# Altium PCB PCB_Mbed_diffo_tcheunang_tayou.PcbDoc
Units mil, origin at the board's own origin, x right, y up, seen from the top; angles counter-clockwise.
Board outline 1968.5 x 2755.91 mil, 2 copper layers (Top Layer, Bottom Layer); 19 components, 22 nets, 90 pads, 17 vias.
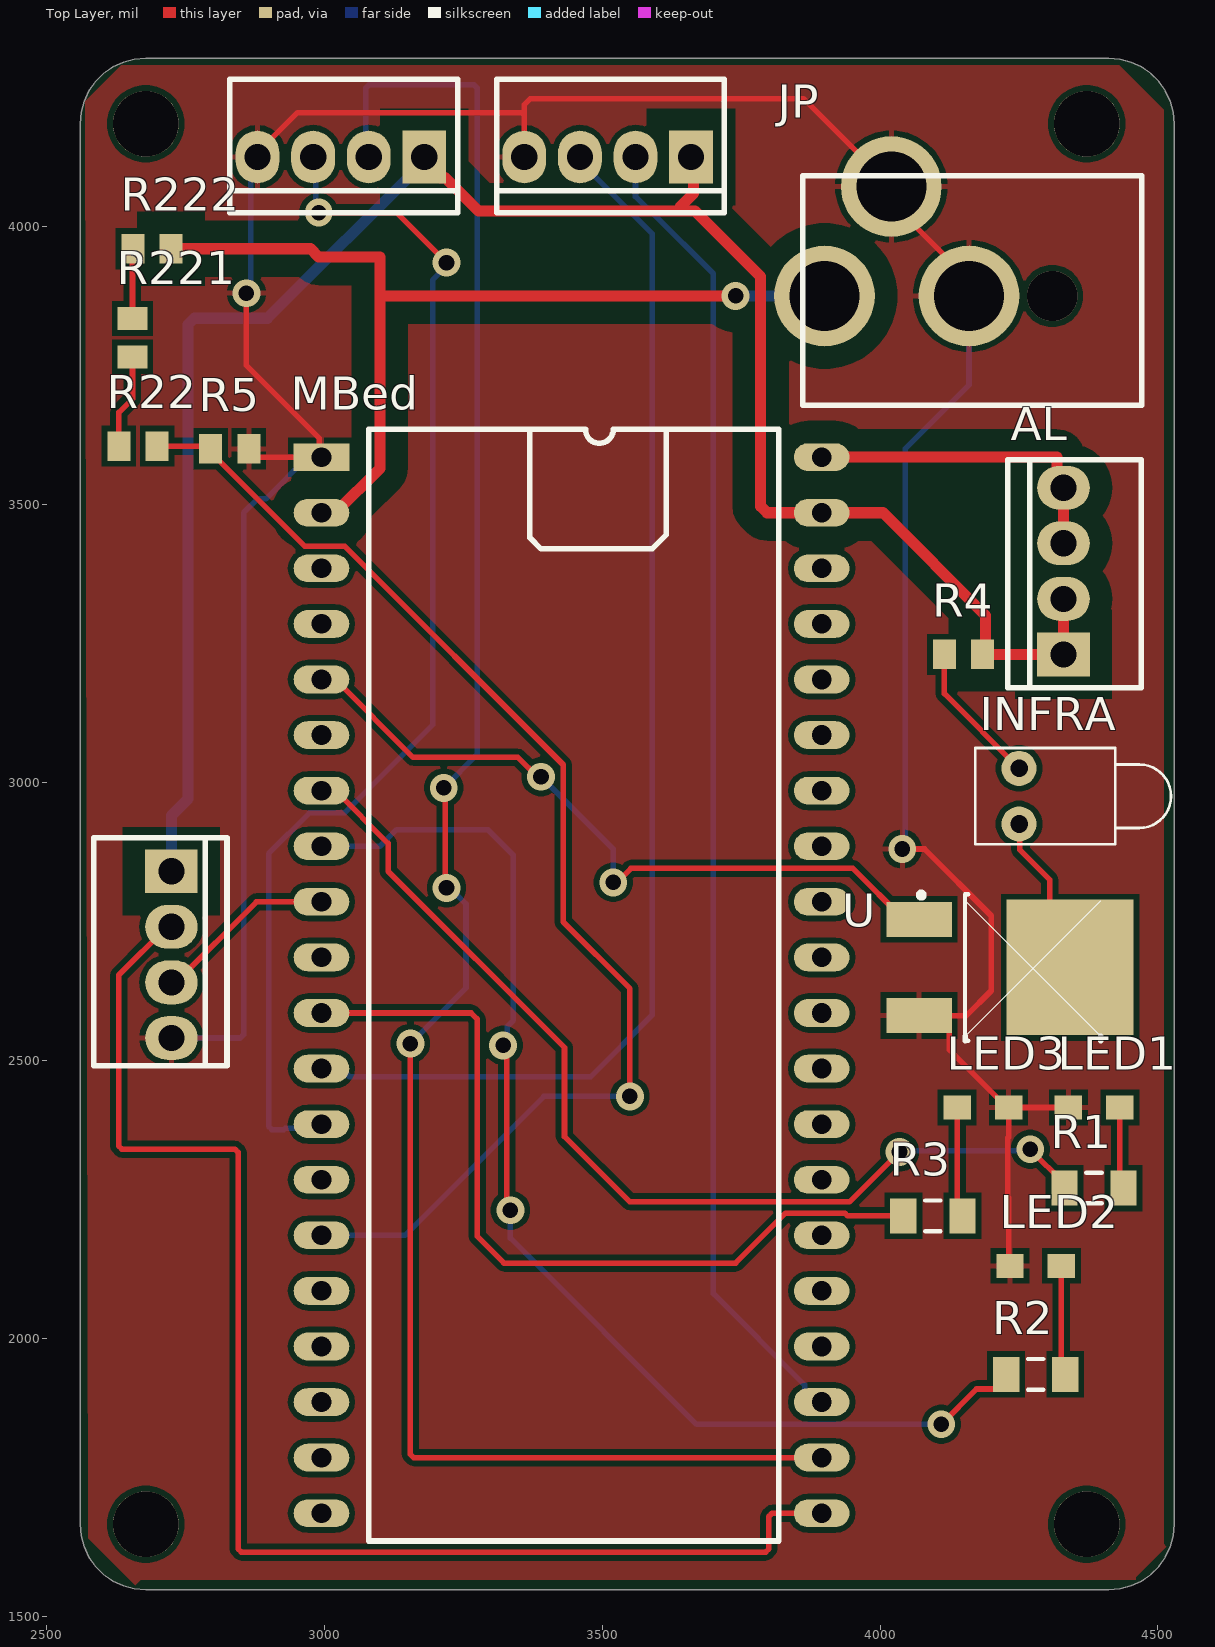
[diagram p0: Top Layer view]
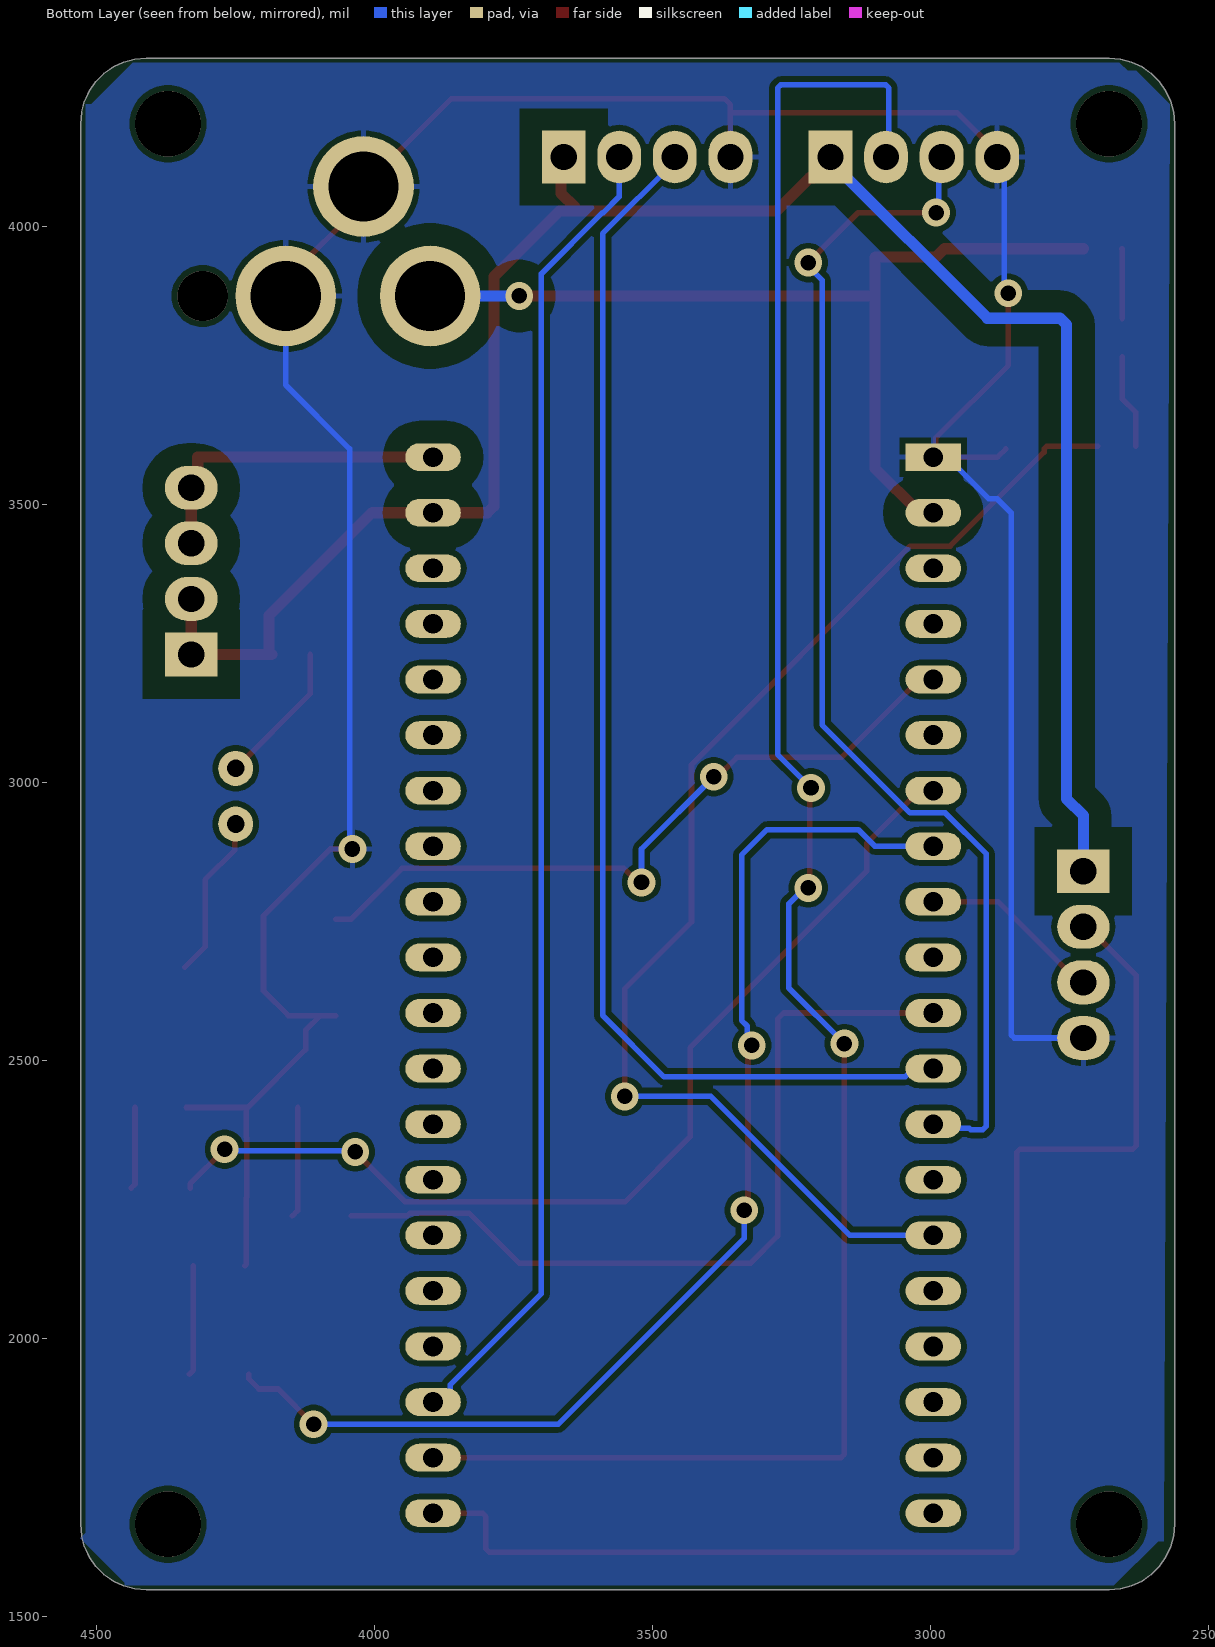
[diagram p1: Bottom Layer view, seen from below]
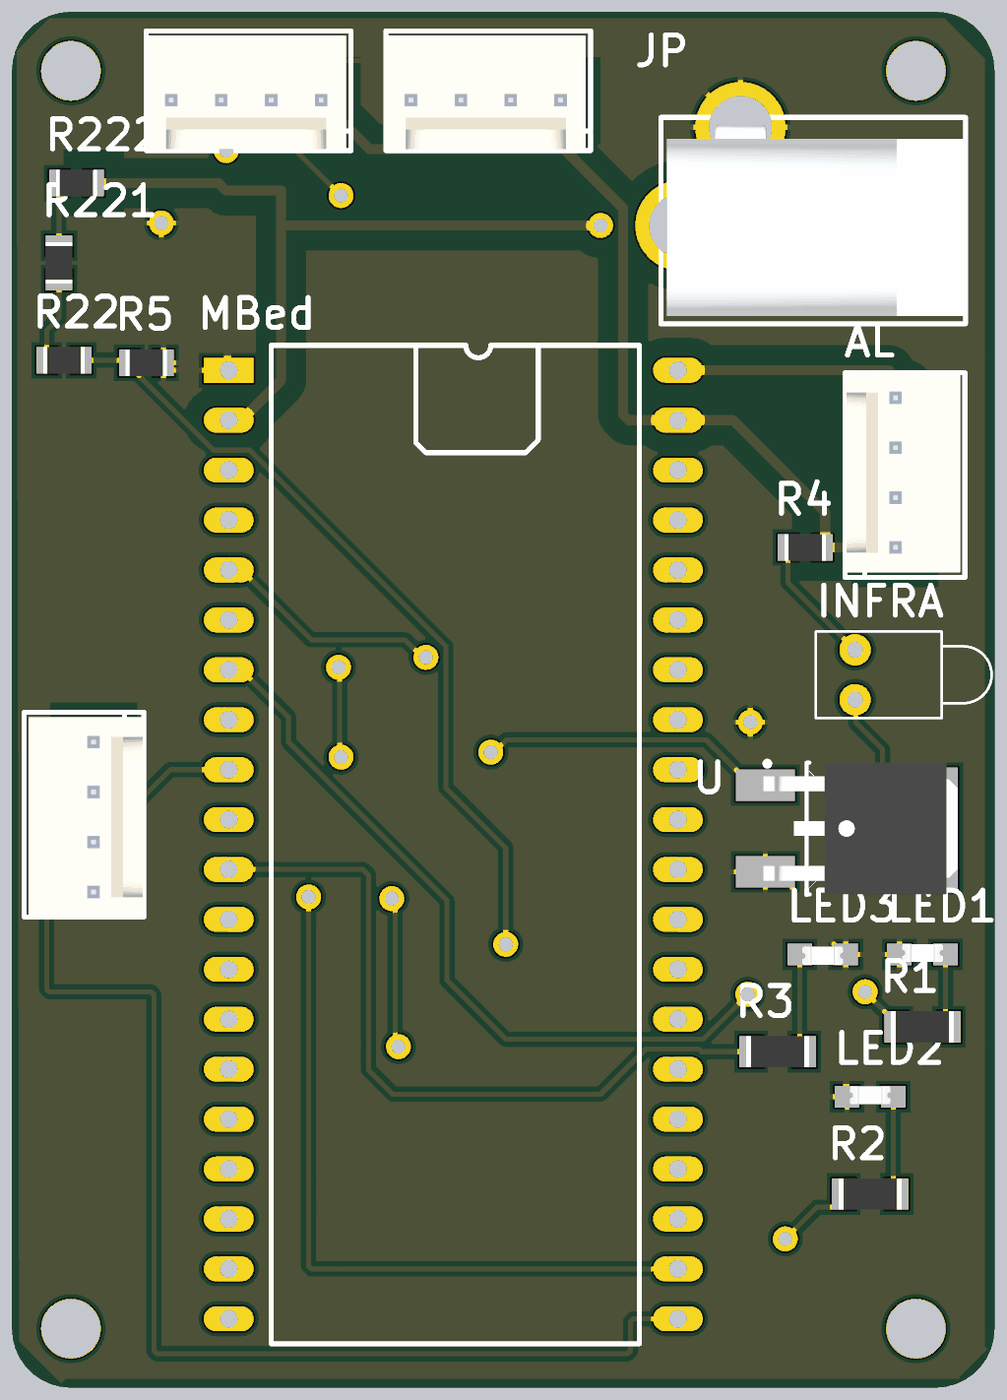
[diagram p2: 3D render of the assembled board from above, using the file's embedded part models]

## Layer stack, top to bottom
Top Solder: solder mask 0.4, Solder Resist, Dk 3.5
Top Layer: signal copper 1.4
Dielectric 1: dielectric 12.6, FR-4, Dk 4.8
Bottom Layer: signal copper 1.4
Bottom Solder: solder mask 0.4, Solder Resist, Dk 3.5

## Board outline
4411.14,1547.05 4431.65,1548.84 4451.54,1554.17 4470.2,1562.87 4487.06,1574.68 4501.62,1589.24 4513.43,1606.1 4522.13,1624.76 4527.46,1644.65 4529.25,1665.16 4529.25,4184.84 4527.46,4205.35 4522.13,4225.24 4513.43,4243.9 4501.62,4260.76 4487.06,4275.32 4470.2,4287.13 4451.54,4295.83 4431.65,4301.16 4411.14,4302.95 2678.86,4302.95 2658.35,4301.16 2638.46,4295.83 2619.8,4287.13 2602.94,4275.32 2588.38,4260.76 2576.57,4243.9 2567.87,4225.24 2562.54,4205.35 2560.75,4184.84 2560.75,1665.16 2562.54,1644.65 2567.87,1624.76 2576.57,1606.1 2588.38,1589.24 2602.94,1574.68 2619.8,1562.87 2638.46,1554.17 2658.35,1548.84 2678.86,1547.05

## Design rules (kind name [scope] priority, off if disabled: settings)
Clearance Clearance_1 [InNetClass('POWER')] p1: gap=10 ignorepadtopadclearanceinfootprint=FALSE except(0: Arc-Hole Track-Hole SMDPad-Hole THPad-Hole Via-Hole Fill-Hole Poly-Hole Region-Hole Text-Hole; 20: Arc-Region Track-Region SMDPad-Region THPad-Region Via-Region Fill-Region Poly-Region Region-Region; 40: Arc-Poly Track-Poly SMDPad-Poly THPad-Poly Via-Poly Fill-Poly Poly-Poly)
Clearance [All] p2: gap=10 ignorepadtopadclearanceinfootprint=FALSE except(0: Arc-Hole Track-Hole SMDPad-Hole THPad-Hole Via-Hole Fill-Hole Poly-Hole Region-Hole Text-Hole)
PolygonConnect [All] p1: connectstyle=Relief reliefconductorwidth=10 reliefentries=4 polygonreliefangle="90 Angle" airgapwidth=10
RoutingVias [All] p1: holewidth=28 width=50 viastyle="Through Hole" minholewidth=28 minwidth=50 maxholewidth=28 maxwidth=50
SolderMaskExpansion [All] p1: expansion=4 istentingtop=FALSE
Width Width_1 [InNetClass('POWER')] p1: maxlimit=20 minlimit=10 preferedwidth=20 bottomlayer_minwidth=20 minimp=50.000000 maximp=50.000000 favimp=50.000000
Width [All] p2: maxlimit=10 minlimit=10 preferedwidth=10
30 further rules are at their usual default settings.

## Classes and differential pairs
net class POWER: VCC_9v VOUT_3_3V VOUT_5V

## Components (designator, comment, footprint, x,y, rotation, side; value= is the part's Value field where it differs from the comment)
AL "ALIM_3_5" MOLEX-KK-22-27-2041 4330,3380 r90 top
INFRA "IR_SFH409" LED-1 4250,2975 r0 top
JP "DC Socket 2.5mm" "DC 2.5mm" 4471.02,3875 r180 top
LED1 "LED_R_0805" "Led - 0805" 4385,2415 r0 top
LED2 "LED_G_0805" "Led - 0805" 4280,2130 r0 top
LED3 "LED_B_0805" "Led - 0805" 4185,2415 r180 top
MBed "mbed LPC1768" DIP40-LARGE 2995,3585 r0 top
R1 "R_100R_1206" RESC3116X06N 4385,2270 r180 top value=100
R2 "R_100R_1206" RESC3116X06N 4280,1935 r180 top value=100
R3 "R_100R_1206" RESC3116X06N 4095,2220 r180 top value=100
R4 "R_330R_0805" RESC2012X05N 4150,3230 r180 top value=330
R5 "R_330R_0805" RESC2012X05N 2830,3600 r180 top value=330
R22 "R_330R_0805" RESC2012X05N 2665,3605 r180 top value=330
R221 "R_120R_0805" RESC2012X05N 2655,3800 r90 top value=120
R222 "R_120R_0805" RESC2012X05N 2690,3960 r0 top value=120
U "T_NMOS_100V_10A_DPAK" DPAK228P990X238-3N 4275,2665 r0 top
? "CAPTEUR 2" MOLEX-KK-22-27-2041 3030,4125 r180 top
? "CAPTEUR 3" MOLEX-KK-22-27-2041 2725,2690 r270 top
? "CAPTEUR 1" MOLEX-KK-22-27-2041 3510,4125 r180 top

## Footprints (in the part's own frame and the unit in brackets; to place one, negate y for a bottom-side part, rotate by r counter-clockwise, add the part's x,y. Pads: shape width x height; smd on the part's side, far side on the other; paste and mask are expansions set on the pad)
"DC 2.5mm" [mm]
  round 4.6 hole 3.2: 1(14.5,0) 2(7.9,0) 2(11.45,-5)
  silkscreen extent 0,-5.5 15.5,5, body extent 0,-5.1 15.2,4.6, height 11.5
DIP40-LARGE [mm]
  rect 2.54x1.27 hole 0.9: 1(0,0)
  oval 2.54x1.27 hole 0.9: 2(0,-2.54) 3(0,-5.08) 4(0,-7.62) 5(0,-10.16) 6(0,-12.7) 7(0,-15.24) 8(0,-17.78) 9(0,-20.32) 10(0,-22.86) 11(0,-25.4) 12(0,-27.94) 13(0,-30.48) 14(0,-33.02) 15(0,-35.56) 16(0,-38.1) 17(0,-40.64) 18(0,-43.18) 19(0,-45.72) 20(0,-48.26) 21(22.86,-48.26) 22(22.86,-45.72) 23(22.86,-43.18) 24(22.86,-40.64) 25(22.86,-38.1) 26(22.86,-35.56) 27(22.86,-33.02) 28(22.86,-30.48) 29(22.86,-27.94) 30(22.86,-25.4) 31(22.86,-22.86) 32(22.86,-20.32) 33(22.86,-17.78) 34(22.86,-15.24) 35(22.86,-12.7) 36(22.86,-10.16) 37(22.86,-7.62) 38(22.86,-5.08) 39(22.86,-2.54) 40(22.86,0)
  silkscreen extent 2.16,-49.53 20.9,1.27, body extent -1.65,-49.5 24.87,1.3, height 10.92
DPAK228P990X238-3N [mm] "D-PAK, 3-Pads, Body 6,20x6,72mm (max), IPC Medium Density"
  rect 3x1.6 smd: 1(-5.203,2.251) 2(-5.203,-2.149)
  rect 5.8x6.2 smd: 3(1.697,0.051)
  silkscreen extent -5.23,-3.3 3.09,3.48, body extent -5.3,-3.3 4.6,3.4, height 2.38
"Led - 0805" [mm] "Led generic, 2-Leads, Body 2,00x1,25mm, IPC Medium Density"
  rect 1.25x1.1 smd: 1(1.175,0) 2(-1.175,0)
  body extent -1.03,-0.38 1.03,0.53, height 0.85
LED-1 [mm] "LED; 2 Leads"
  round 1.6 hole 0.8: 1(0,1.27) 2(0,-1.27)
  silkscreen extent -2,-2.2 6.95,2.2
MOLEX-KK-22-27-2041 [mm] "2.54mm (.100\") Pitch KK® Wire-to-Board Header, Vertical, with Friction Lock, 4 Circuits"
  rect 2x2.4 hole 1.2: 1(-3.81,0)
  oval 2x2.4 hole 1.2: 2(-1.27,0) 3(1.27,0) 4(3.81,0)
  silkscreen extent -5.33,-3.56 5.08,2.54, body extent -5.08,-3.33 5.08,2.47, height 11.54
RESC2012X05N [mm] "Chip Resistor, 2-Leads, Body 2,00x1,25mm, IPC Medium Density"
  rect 1.05x1.35 smd: 1(-0.875,0) 2(0.875,0)
  body extent -1.05,-0.67 1.05,0.67, height 0.5
RESC3116X06N [mm] "Chip Resistor, 2-Leads, Body 3,10x1,55mm, IPC Medium Density"
  rect 1.2x1.6 smd: 1(-1.35,0) 2(1.35,0)
  silkscreen extent -0.35,-0.7 0.35,0.7, body extent -1.6,-0.8 1.6,0.8, height 0.65

## Part data
AL ? ? ?: library part MOLEX_KK_4CTS_VERTICAL, "2.54mm (.100\") Pitch KK® Wire-to-Board Header, Vertical, with Friction Lock, 4 Circuits", Supplier Part Number 1=4838483P, Supplier 1=RSComponents
INFRA: library part LED1, "Typical RED GaAs LED", LatestRevisionDate=08-Jul-2005, LatestRevisionNote="Mech Layer 1 removed.", PackageDescription="LED; 2 Leads", PackageReference=LED-1, Published=8-Jun-2000, Publisher="Altium Limited"
JP: "DC Socket 2.5mm 16V 2A", Supplier Part Number 1=884-0944, Supplier 1=RS-Components
LED1: "Red GaAlAs LED 0805 41mcd 160°", Supplier Part Number 1=1217787, Mounting=YES, Supplier 1=RSComponents
LED2: "Green GaAs LED 0805 6mcd 130°", Supplier Part Number 1=1689723, LatestRevisionDate=17-Jul-2002, LatestRevisionNote="Re-released for DXP Platform.", Mounting=YES, PackageDescription="SM LED; 2 Flat Leads", PackageReference=3.2X1.6X1.1, PackageVersion=Feb-2002, Published=8-Jun-2000, Publisher="Altium Limited", Supplier 1=RSComponents
LED3: "Blue InGaN LED 0805 180mcd 130°", Supplier Part Number 1=1689728, Mounting=YES, Supplier 1=RSComponents
MBed: "Prototyping Board", Supplier Part Number 1=1761179, Supplier 1=Farnell, Supplier 2=RS-Components, Supplier Part Number 2=769-4182
R1 R2 R3: "Resistor 100 Ohms 1/3W 1206 1%", Supplier Part Number 1=2689160, Mounting=YES, Supplier 1=Farnell
R4 R5 R22: "Resistor 330 Ohms 0.5W 0805 1%", Mounting=YES, Supplier 1=RSComponents
R221 R222: "Resistor 120 Ohms 0.5W 0805 5%", Supplier Part Number 1=1621662, Mounting=YES, Supplier 1=RSComponents
U: "IRLR120 MOSFET N-CH 100V 10A DPAK", Supplier Part Number 1=2781153, Mounting=YES, Supplier 1=Farnell

## Free pads (board coordinates)
  round 118.11 hole 118.11: 1(2678.86,1665.16) 1(2678.86,4184.84) 1(4371.77,1665.16) 1(4371.77,4184.84)

## Via types
v1: diameter 50, hole 28, Top Layer to Bottom Layer, 16 vias
v2: diameter 90.55, hole 90.55, Top Layer to Bottom Layer, 1 vias

## Nets (pads, with @x,y where several pads share a name; then routed paths per layer and width w, separated by ;. In a path a pad name is that pad's centre, name@x,y a point inside that pad or via, vN(x,y) a via of type N, cw(c..) or ccw(c..) an arc to the next point about the centre after c; other vN are vias at no path point)
COM_LED: MBed.15 R5.2 R22.1 | length 2276.4
  Top Layer w10: R22.1 2790.55,3605 R5.2 2795.55,3594.09 2964.65,3425 3036.57,3425 3430,3031.57 3430,2748.7 3550,2628.7 v1(3550,2435)
  Bottom Layer w10: MBed.15 3145,2185 3395,2435 v1(3550,2435)
ECHO_1: ?.3@3460,4125 MBed.12 | length 2245.1
  Bottom Layer w10: MBed.12 3030.82,2485 3045.82,2470 3479.14,2470 3590,2580.86 3590,3987.13 3460,4117.13 ?.3@3460,4125
ECHO_2: ?.3@2980,4125 MBed.13 | length 2201.7
  Top Layer w10: v1(2990,4025) 3130,4025 v1(3220,3935)
  Bottom Layer w10: ?.3@2975,4125 2980,4125 2980,4100.24 2985,4095.24 2985,4030 v1(2990,4025) ; MBed.13 2987.48,2377.48 2930,2377.48 2927.52,2375 2905.86,2375 2900,2380.86 2900,2871.57 2973.43,2945 3036.57,2945 3195,3103.43 3195,3903.43 3220,3928.43 v1(3220,3935)
ECHO_3: ?.3@2725,2640 MBed.9 | length 330.1
  Top Layer w10: ?.3@2725,2640 2732.87,2640 2877.87,2785 MBed.9
gate: MBed.5 U.1 | length 1309.7
  Top Layer w10: MBed.5 3020,3185 3160,3045 3348.43,3045 3383.43,3010 v1(3390,3010) ; v1(3520,2820) 3526.57,2820 3551.57,2845 3951.23,2845 4042.61,2753.61 U.1
  Bottom Layer w10: v1(3390,3010) 3520,2880 v1(3520,2820)
GND: ?.4 JP.2 LED1.2 LED2.2 LED3.2 MBed.1 R5.1 U.2 | length 5747.6
  Top Layer w10: v1(2860,3880) 2860,3750 2990.86,3619.14 2990.86,3589.14 MBed.1 2879.45,3585 R5.1 ; ?.4@2880,4125 2880,4132.87 2952.13,4205 3355,4205 3360,4200 ; ?.4@3360,4125 3360,4200 ; v1(4040,2880) 4080,2880 4200,2760 4200,2625 4155.39,2580.39 U.2@4097.73,2580.39 ; U.2 U.2@4097.73,2580.39 ; JP.2@4160,3875 4160,3903.54 4020.24,4043.31 4020.24,4071.85 3862.09,4230 3370.86,4230 3360,4219.14 3360,4200 ; LED2.2 4231.26,2132.48 4231.26,2252.83 4230,2254.09 4230,2360.26 4231.26,2361.52 LED3.2 ; LED1.2 LED3.2 ; U.2@4097.73,2580.39 4124.23,2553.89 4124.23,2519.08 4228.31,2415 LED3.2
  Bottom Layer w10: ?.4@2725,2540 2849.14,2540 2855,2545.86 2855,3485 2880,3510 2895,3510 2970,3585 MBed.1 ; v1(2860,3880) 2867.65,3887.65 2867.65,4112.65 ?.4@2880,4125 ; v1(4040,2880) 4045,2885 4045,3600 4160,3715 JP.2@4160,3875
LED_bleu: MBed.11 R3.2 | length 1501.5
  Top Layer w10: MBed.11 3264.14,2585 3275,2574.14 3275,2183.43 3323.43,2135 3740,2135 3830,2225 3936.57,2225 3941.57,2220 R3.2
LED_rouge: MBed.7 R1.2 | length 1839.6
  Top Layer w10: MBed.7 3020,2985 3115,2890 3115,2840 3432.2,2522.8 3432.2,2362.58 3549.79,2245 3945,2245 v1(4035,2335) ; v1(4270,2340) 4270,2339.72 4331.85,2277.87 R1.2
  Bottom Layer w10: v1(4035,2335) 4037.5,2337.5 4267.5,2337.5 v1(4270,2340)
LED_verte: MBed.8 R2.2 | length 2151.1
  Top Layer w10: v1(3321.72,2526.72) 3328.36,2520.07 3328.36,2236.64 v1(3335,2230) ; v1(4110,1845) 4173.5,1908.5 4208.23,1908.5 4226.85,1927.13 R2.2
  Bottom Layer w10: MBed.8 3100.02,2885 3130.02,2915 3294.14,2915 3340,2869.14 3340,2571.72 3329.37,2561.09 3329.37,2534.37 v1(3321.72,2526.72) ; v1(3335,2230) 3335,2180 3670,1845 v1(4110,1845)
NetINFRA_1: INFRA.1 R4.2 | length 260.7
  Top Layer w10: R4.2 4115.55,3159.45 INFRA.1
NetINFRA_2: INFRA.2 U.3 | length 296
  Top Layer w10: INFRA.2 4251.5,2923.5 4251.5,2878.5 4305,2825 4305,2703.83 U.3
NetLED1_1: LED1.1 R1.1 | length 147.9
  Top Layer w10: LED1.1 4431.26,2276.89 R1.1
NetLED2_1: LED2.1 R2.1 | length 197.9
  Top Layer w10: LED2.1 4326.26,1941.89 R2.1
NetLED3_1: LED3.1 R3.1 | length 198.9
  Top Layer w10: LED3.1 4138.74,2229.41 R3.1
NetR22_2: R22.2 R221.1 | length 170.7
  Top Layer w10: R22.2 2630.55,3665.55 2655,3690 R221.1
NetR221_2: R221.2 R222.1 | length 125.8
  Top Layer w10: R221.2 2655,3959.45 R222.1
TRIG_1: ?.2@3560,4125 MBed.23 | length 2386.8
  Bottom Layer w10: ?.2@3560,4125 3560,4053.65 3588.65,4025 3590,4025 3700,3915 3700,2080 3864.22,1915.78 3864.22,1903.48 3882.69,1885 MBed.23
TRIG_2: ?.2@3080,4125 MBed.22 | length 3631.6
  Top Layer w10: v1(3155,2530) 3155,1790.86 3160.86,1785 MBed.22 ; v1(3215,2990) 3225.82,2990 3217.5,2981.68 3217.5,2812.5 v1(3220,2810)
  Bottom Layer w10: ?.2@3080,4125 3075,4130 3075,4249.14 3080.86,4255 3269.14,4255 3275,4249.14 3275,3050 v1(3215,2990) ; v1(3155,2530) 3255,2630 3255,2781.36 3226.36,2810 v1(3220,2810)
TRIG_3: ?.2@2725,2740 MBed.21 | length 2486.8
  Top Layer w10: ?.2@2725,2740 2717.13,2740 2630,2652.87 2630,2345.86 2635.86,2340 2839.14,2340 2845,2334.14 2845,1620.86 2850.86,1615 3794.14,1615 3800,1620.86 3800,1679.14 3805.86,1685 MBed.21
VCC_9v: JP.1 MBed.2 R222.2 | length 1700.1
  Top Layer w20: R222.2 2975,3960 2990,3945 3100,3945 3100,3875 ; MBed.2 3020,3485 3100,3565 3100,3875 ; v1(3740,3875) 3100,3875
  Bottom Layer w20: v1(3740,3875) JP.1
VOUT_3_3V: AL.3 AL.4 MBed.40 | length 583.1
  Top Layer w20: MBed.40 4318.28,3585 4318.28,3541.72 AL.4 AL.3
VOUT_5V: ?.1 AL.1 AL.2 MBed.39 R4.1 | length 3575.8
  Top Layer w20: ?.1@3180,4125 3180,4117.13 3209.37,4087.76 3217.24,4087.76 3277.24,4027.76 3640,4027.76 ; ?.1@3660,4125 3664.47,4120.53 3664.47,4059.47 3640,4035 3640,4027.76 ; AL.2 AL.1 R4.1 4190,3235.55 4190,3300 4005,3485 MBed.39 3796.72,3485 3785,3496.72 3785,3910 3667.24,4027.76 3640,4027.76
  Bottom Layer w20: ?.1@2725,2840 2725,2940 2755,2970 2755,3823.28 2766.72,3835 2897.87,3835 3180,4117.13 ?.1@3180,4125
pads on no net: MBed.3 MBed.4 MBed.6 MBed.10 MBed.14 MBed.16 MBed.17 MBed.18 MBed.19 MBed.20 MBed.24 MBed.25 MBed.26 MBed.27 MBed.28 MBed.29 MBed.30 MBed.31 MBed.32 MBed.33 MBed.34 MBed.35 MBed.36 MBed.37 MBed.38
copper on no net:
  other v2: 4309.61,3875

## Polygon pours and split planes (outlines as drawn)
GND on Bottom Layer "GND_L02_P001" (solid, remove dead copper, pour order 1): 2580,1635 2590,1635 2670,1555 4450,1555 4450,1560 4530,1640 4520,1650 4520,4220 4510,4220 4435,4295 2660,4295 2645,4280 2630,4280 2570,4220
GND on Top Layer "GND_L01_P002" (solid, remove dead copper, pour order 2): 2570,4225 2635,4290 4430,4290 4510,4210 4510,1630 4515,1625 4460,1570 4460,1565 2670,1565 2660,1555 2575,1640 2575,1650